# EAGLE board 3_draft_offBoard (EAGLE 8.1.0)

Size 88.57 x 88.89 mm. Coordinates in mm from the lower left corner, seen from the top.
Outline: 0,0 88.57,0 88.57,88.89 0,88.89 0,0
Copper layers (1*16): Top 0.035mm / dielectric 1.5mm / Bottom 0.035mm
Design rules "default *": minimum track width 8mil, minimum drill 14mil, track to track 8mil, track to pad 8mil, pad to pad 8mil, via to via 8mil, smd to smd 8mil, copper to edge 40mil, drill to drill 8mil, minimum pad ring 10mil, minimum via ring 8mil, stop-mask expansion 4mil, vias tented up to drill 0mil, thermal gap 10mil

## Footprints (pad centres in the part's own frame; a part is rotated, then mirrored left to right if it is on the bottom)
BUZZER-12MM = drill 0.9 pad 1.778: + 3.25,0; - -3.25,0
LED_5MM = drill 0.813 pad 1.88: A -1.27,0; K 1.27,0
1X02_LOCK = drill 1.016 pad 1.88: 1 -0.178,0; 2 2.718,0
1X03 = drill 1.016 pad 1.88: 1 0,0; 2 2.54,0; 3 5.08,0
MICROPHONE-PTH-9.7MM = drill 0.8 pad 1.676: GND -2,-1.27; OUT -2,1.27
PHOTOCELL-KIT = drill 0.9 pad 1.88: 1 -2,0; 2 2,0
LED-TRICOLOR-5050-IC = smd 2 x 1.1: 1 -2.4,1.7; 2 -2.4,0; 3 -2.4,-1.7; 4 2.4,-1.7; 5 2.4,0; 6 2.4,1.7

## Placement (x,y rotation side)
BUZZER1  BUZZER-PTH  [BUZZER-12MM]  -73.66,-146.05 0 top  (outside the outline)
D6  LED-IRTSAL6100  [LED_5MM]  -53.34,-31.75 0 top  (outside the outline)
D7  LED-IRTSAL6100  [LED_5MM]  -74.93,-50.8 0 top  (outside the outline)
D8  LED-IRTSAL6100  [LED_5MM]  -53.34,-50.8 0 top  (outside the outline)
D9  LED-IRTSAL6100  [LED_5MM]  -74.93,-69.85 0 top  (outside the outline)
IR_LED1  [1X02_LOCK]  -76.2,-31.75 0 top  (outside the outline)
J3_PHOTO1  [1X02_LOCK]  -76.2,-107.95 0 top  (outside the outline)
J7_BUZ1  [1X02_LOCK]  -76.2,-127 0 top  (outside the outline)
J7_MIC1  [1X02_LOCK]  -76.2,-231.14 0 top  (outside the outline)
J7_NEO1  [1X03]  -76.2,-165.1 0 top  (outside the outline)
J7_TMP_B1  [1X02_LOCK]  -76.2,-193.04 0 top  (outside the outline)
MK2  MIC-PTH  [MICROPHONE-PTH-9.7MM]  -74.93,-212.09 0 top  (outside the outline)
R22  PHOTOCELLPTH-KIT  [PHOTOCELL-KIT]  -73.66,-88.9 0 top  (outside the outline)
U2  WS2812  [LED-TRICOLOR-5050-IC]  -80.01,-179.07 0 top  (outside the outline)

## Library data of the parts
BUZZER1 = SparkFun-Electromechanical; PROD_ID: COMP-08253; SF_SKU: COM-07950
D6-D9 = SparkFun-LED; PROD_ID: DIO-12058
IR_LED1 J3_PHOTO1 J7_BUZ1 J7_MIC1 J7_NEO1 J7_TMP_B1 = SparkFun-Connectors
MK2 = SparkFun-Sensors; PROD_ID: COMP-08856; SF_ID: COM-08635
R22 = SparkFun-Sensors; PROD_ID: COMP-09129; SF_ID: SEN-09088
U2 = SparkFun-LED; PROD_ID: DIO-11598

## Nets
5V: D6.A IR_LED1.1
5V1: J7_NEO1.1 U2.2
A4: J3_PHOTO1.2 R22.2
BUZ+1: BUZZER1.+ J7_BUZ1.1
BUZ-1: BUZZER1.- J7_BUZ1.2
D1: J7_NEO1.2 U2.3 U2.5
GND1: J3_PHOTO1.1 R22.1
GND2: J7_NEO1.3 U2.6
IR_-: D9.K IR_LED1.2
N$28: D6.K D7.A
N$31: D7.K D8.A
N$33: D8.K D9.A
N$34: J7_MIC1.1 MK2.GND
N$35: J7_MIC1.2 MK2.OUT
TMP+: J7_TMP_B1.1
TMP-: J7_TMP_B1.2

## Tracks (layer width: path | path; a pad name or v marks a point on that pad's centre or on a via)
5V  (1 unrouted)
5V1  (1 unrouted)
A4  (1 unrouted)
BUZ+1  (1 unrouted)
BUZ-1  (1 unrouted)
D1  (2 unrouted)
GND1  (1 unrouted)
GND2  (1 unrouted)
IR_-  (1 unrouted)
N$28  (1 unrouted)
N$31  (1 unrouted)
N$33  (1 unrouted)
N$34  (1 unrouted)
N$35  (1 unrouted)